# Altium PCB Linear_camera_PCB.PcbDoc
Units mm, origin at the board's own origin, x right, y up, seen from the top; angles counter-clockwise.
Board outline 25 x 25 mm, 4 copper layers (Top Layer, Internal Plane 1, Internal Plane 2, Bottom Layer); 13 components, 9 nets, 43 pads, 26 vias.
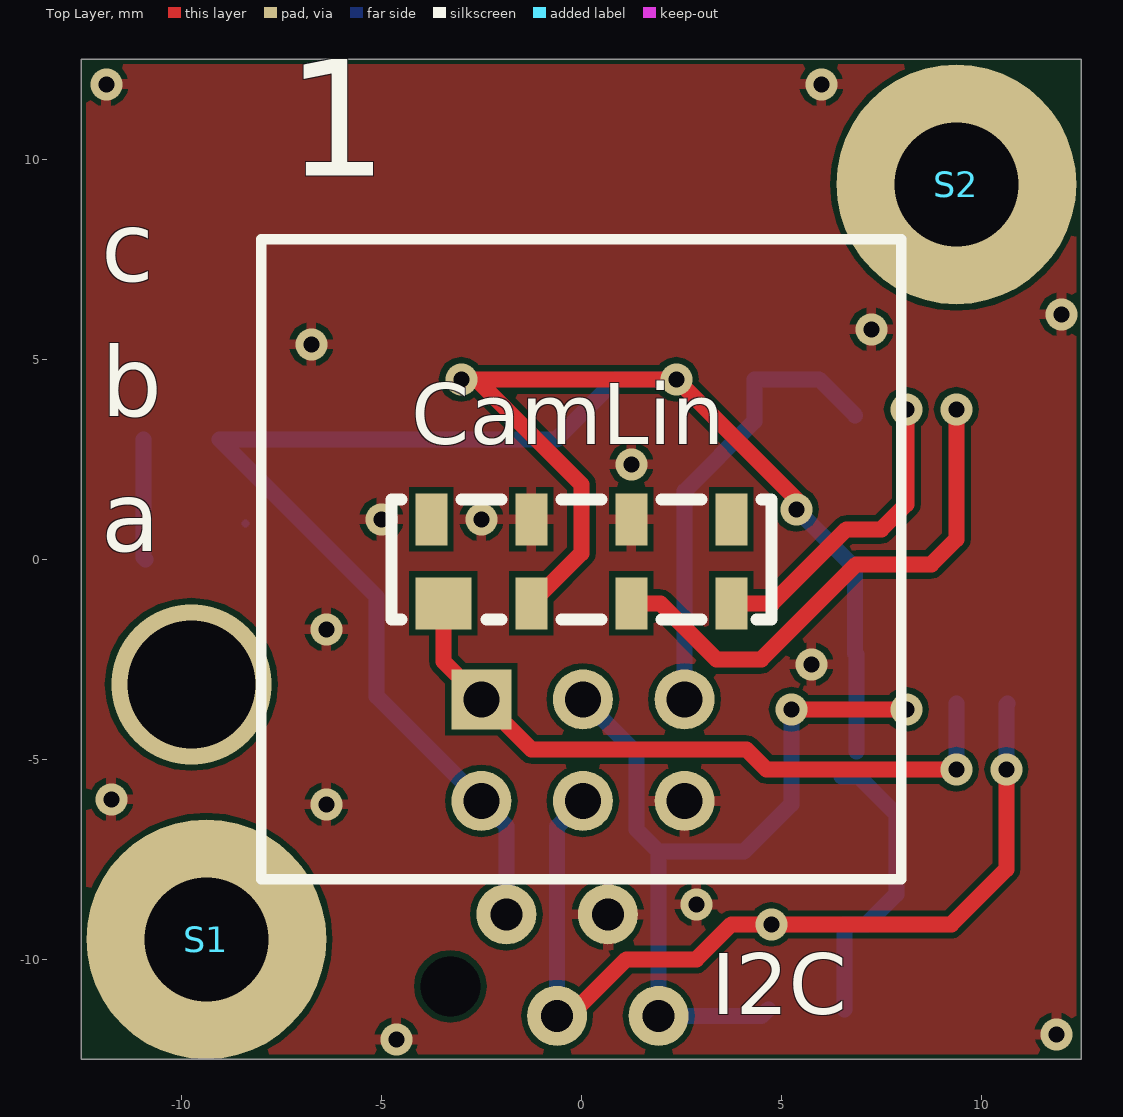
[diagram p0: Top Layer view]
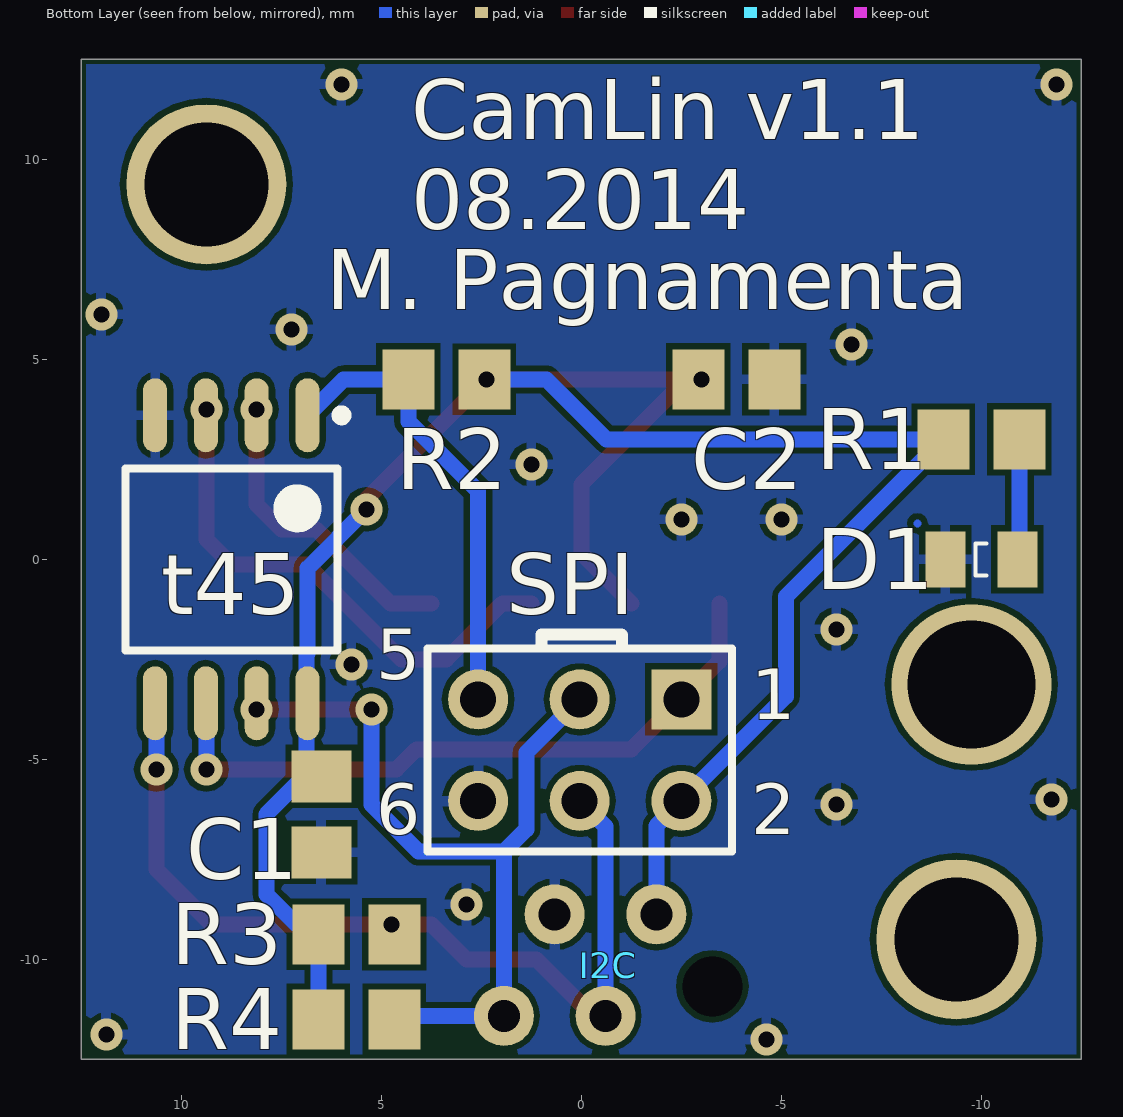
[diagram p1: Bottom Layer view, seen from below]
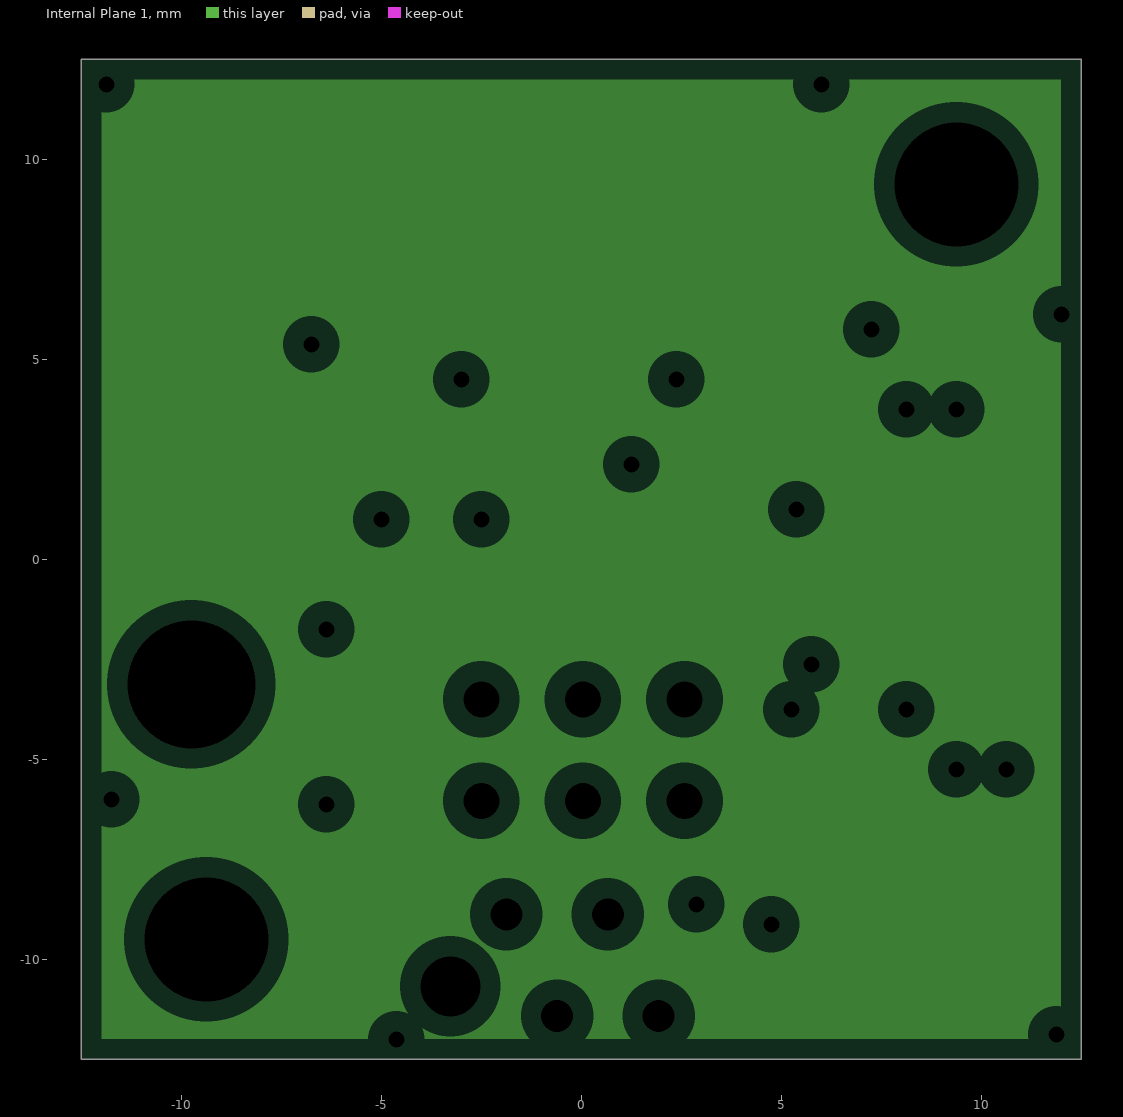
[diagram p2: Internal Plane 1, clearances drawn from the general rule]
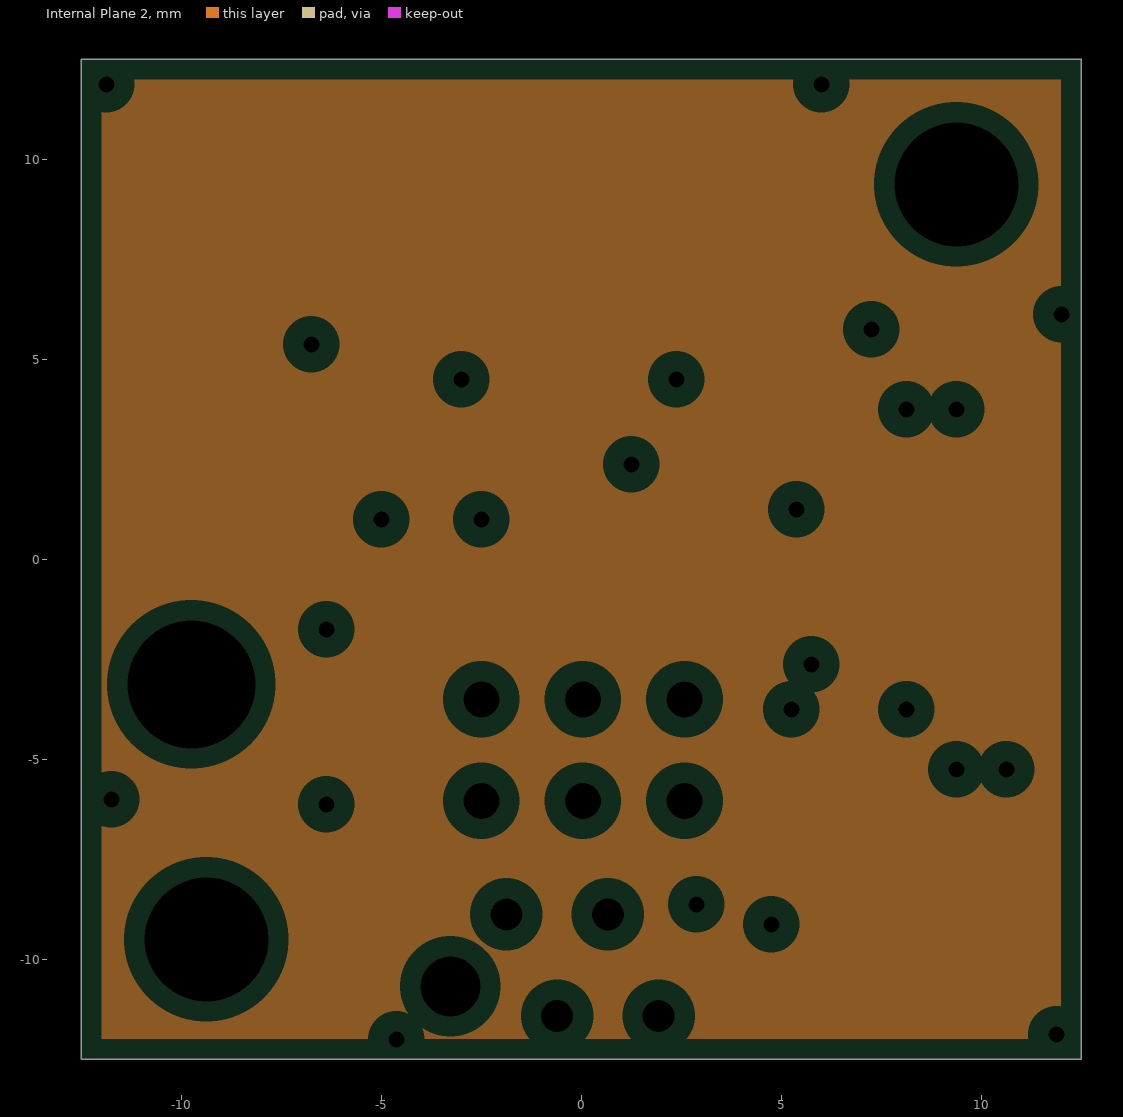
[diagram p3: Internal Plane 2, clearances drawn from the general rule]
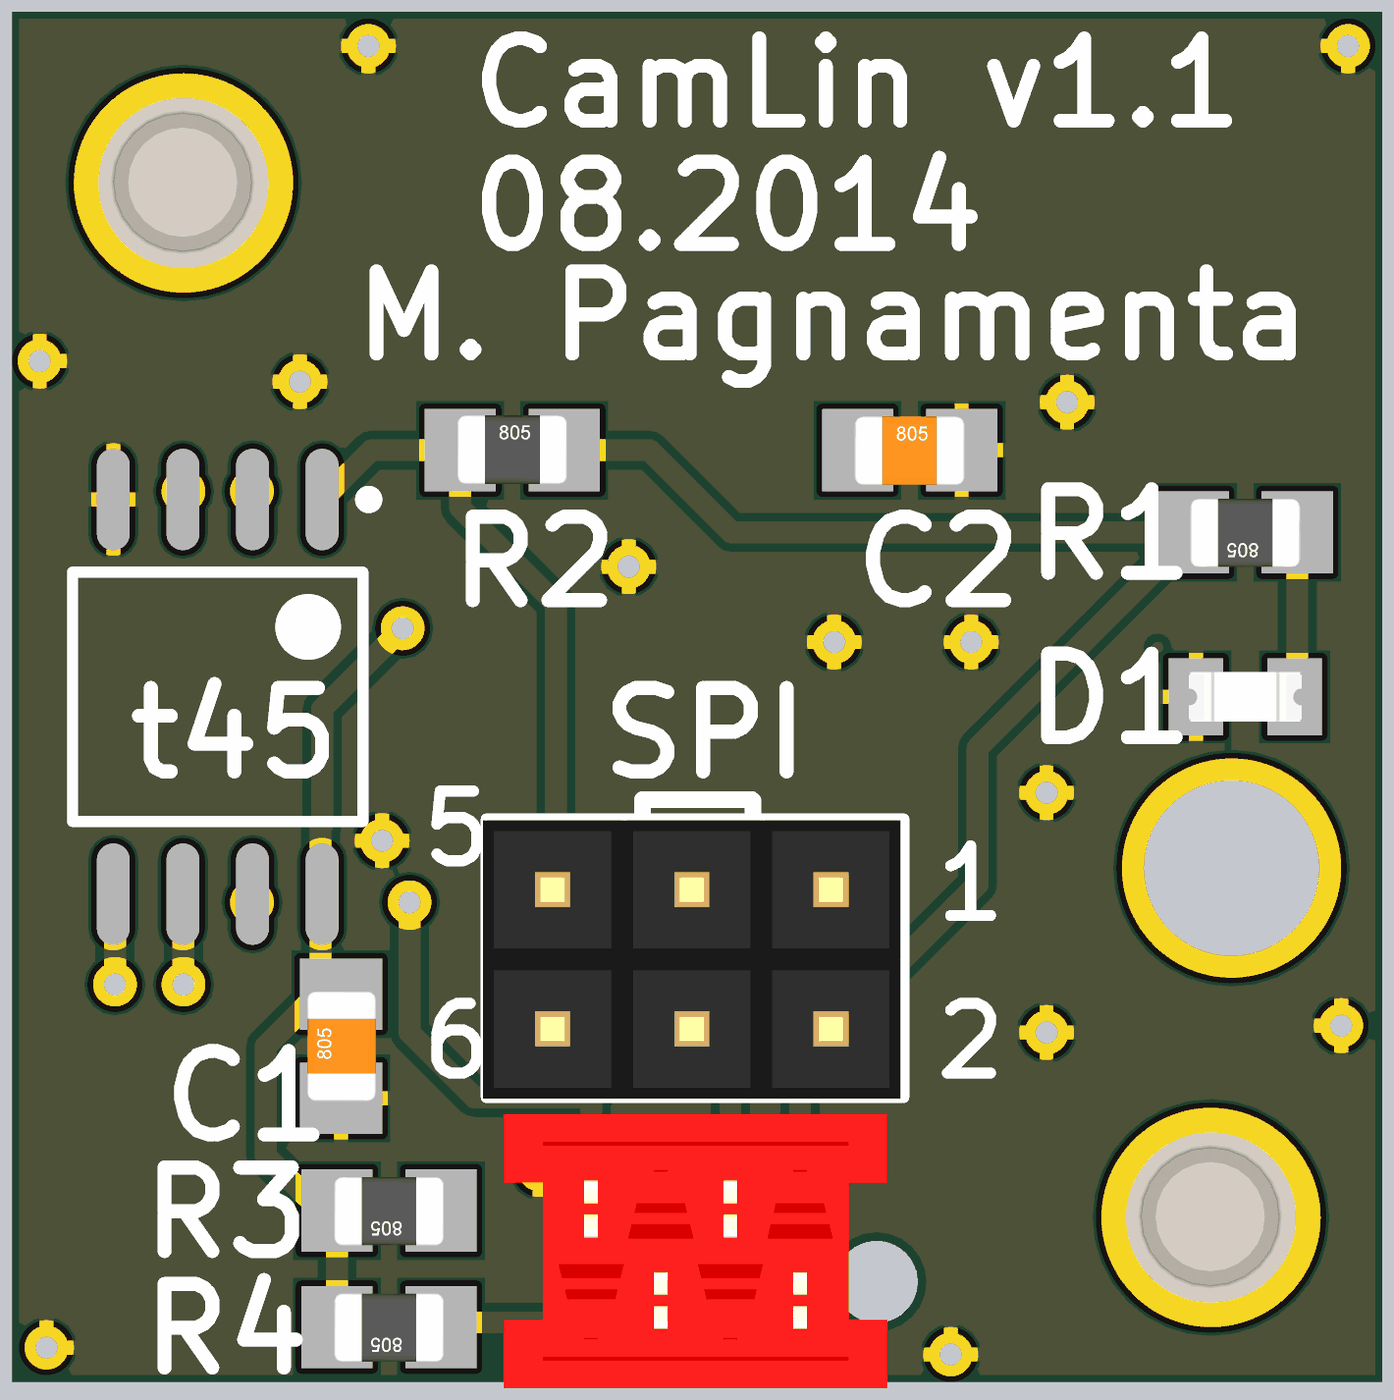
[diagram p4: 3D render of the assembled board from below, using the file's embedded part models]

## Layer stack, top to bottom
Top Layer: signal copper 0.0356
Dielectric: dielectric 0.32, FR-4, Dk 4.8
Internal Plane 1: plane copper 0.0356
Dielectric: dielectric 0.32, FR-4, Dk 4.8
Internal Plane 2: plane copper 0.0356
Dielectric: dielectric 0.32, FR-4, Dk 4.8
Bottom Layer: signal copper 0.0356

## Board outline
-12.5,-12.5 12.5,-12.5 12.5,12.5 -12.5,12.5

## Design rules (kind name [scope] priority, off if disabled: settings)
Clearance [All] p1: gap=0.15
PlaneClearance [All] p1: clearance=0.508
PlaneConnect [All] p1: planeconnectstyle=Direct reliefexpansion=0.508 reliefentries=4 reliefconductorwidth=0.254 reliefairgap=0.254
PolygonConnect PolygonConnect_nettie [InComponent('nt1') vs InNet('GND')] p1: connectstyle=Direct reliefconductorwidth=0.254 reliefentries=4 polygonreliefangle="90 Angle"
PolygonConnect PolygonConnect_pad [InComponent('U3') vs InNet('GND')] p2: connectstyle=Direct reliefconductorwidth=0.254 reliefentries=4 polygonreliefangle="90 Angle"
PolygonConnect [All] p3: connectstyle=Relief reliefconductorwidth=0.254 reliefentries=4 polygonreliefangle="90 Angle"
RoutingVias [All] p1: holewidth=0.35 width=0.6 viastyle="Through Hole" minholewidth=0.2 minwidth=0.4 maxholewidth=1.2 maxwidth=1
SilkscreenOverComponentPads [All] p1: minsilkscreentomaskgap=0.254
SolderMaskExpansion SolderMaskExpansion_via [IsVia] p1: expansion=-0.5
SolderMaskExpansion [All] p2: expansion=0.102
Width [All] p1: maxlimit=1 minlimit=0.203 preferedwidth=0.203
25 further rules are at their usual default settings.

## Components (designator, comment, footprint, x,y, rotation, side; value= is the part's Value field where it differs from the comment)
C1 "C" C/0805 6.5,-6.375 r90 bottom
C2 "C" C/0805 -3.875,4.5 r180 bottom
CamLin "Header 2" TSL3301CL -3.75,1 r90 top (schematic designator P3)
D1 "LED" LED-2012[0805] -10,0 r180 bottom
I2C "I2C" TYCO/215079-4 -1.875,-8.875 r180 bottom (schematic designator P2)
R1 "1kOhm" R/0805 -10,3 r0 bottom
R2 "10kOhm" R/0805 3.375,4.5 r180 bottom
R3 "10kOhm" R/0805 5.625,-9.375 r0 bottom
R4 "10kOhm" R/0805 5.625,-11.5 r0 bottom
S1 "SCREW" HW/SCREW/M3 -9.375,-9.5 r0 top
S2 "SCREW" HW/SCREW/M3 9.375,9.375 r0 top
SPI "ISP" HEADER2X3 -2.5,-3.5 r0 bottom (schematic designator P1)
t45 "ATtiny25" SOP8S2 8.75,0 r270 bottom

## Footprints (in the part's own frame and the unit in brackets; to place one, negate y for a bottom-side part, rotate by r counter-clockwise, add the part's x,y. Pads: shape width x height; smd on the part's side, far side on the other; paste and mask are expansions set on the pad)
C/0805 [mm] "Chip Resistor; Body 2.0 x 1.3 mm (LxW typ)"
  rect 1.3x1.5 smd: 1(-0.95,0) 2(0.95,0)
  body extent -1,-0.64 1,0.62, height 0.78
HEADER2X3 [mm] "Connector; Header; 3x2 Position"
  rect 1.5x1.5 hole 0.9: 1(0,0)
  round 1.5 hole 0.9: 2(0,2.54) 3(2.54,0) 4(2.54,2.54) 5(5.08,0) 6(5.08,2.54)
  silkscreen extent -1.27,-1.27 6.35,3.81, body extent -1.21,-1.25 6.41,3.83, height 8.44
HW/SCREW/M3 [mm]
  round 6 / inner round 4 / far side round 4 hole 3.1: 1(0,0)
  body extent -2.24,-2.24 2.26,2.26, height 2.5
LED-2012[0805] [mm] "SMD LED - 0805 package"
  rect 1x1.4 smd: A(0.9,0) K(-0.9,0)
  Top Layer lines w0.203: -1.6,0.9 -1.6,0.9
  silkscreen extent -0.15,-0.4 0.13,0.4, body extent -1.03,-0.46 1.03,0.45, height 0.84
R/0805 [mm] "Chip Resistor; Body 2.0 x 1.3 mm (LxW typ)"
  rect 1.3x1.5 smd: 1(-0.95,0) 2(0.95,0)
  body extent -1,-0.62 1,0.63, height 0.78
SOP8S2 [mm]
  oval 1.85x0.6 smd: 1(-3.6,1.905) 2(-3.6,0.635) 3(-3.6,-0.635) 4(-3.6,-1.905) 5(3.6,-1.905) 6(3.6,-0.635) 7(3.6,0.635) 8(3.6,1.905)
  silkscreen extent -3.72,-2.65 2.27,2.88, body extent -2.7,-2.68 2.7,2.68, height 1.7
TSL3301CL [mm]
  rect 1.3x1.4 smd: 1(-2.1,-0.3)
  rect 1.3x0.8 smd: 2(-2.1,-2.5) 3(-2.1,-5) 4(-2.1,-7.5) 5(0,-7.5) 6(0,-5) 7(0,-2.5) 8(0,0)
TYCO/215079-4 [mm]
  round 1.5 hole 0.8: 1(0,0) 2(-1.27,-2.54) 3(-2.54,0) 4(-3.81,-2.54)
  round 1.3 hole 1.5 unplated: 5(1.4,-1.8)
  body extent -5.41,-3.74 1.6,1.26, height 4

## Part data
C1 C2: "Capacitor"
CamLin: library part TSL3301CL, "Header, 2-Pin"
I2C: library part Micromatch-I2C, "Micromatch I2C Connector"
R1 R2 R3 R4: library part R, "Resistor"
SPI: library part "AVR ISP 6pin", "AVR ISP 6pin"

## Via types
v1: diameter 0.8, hole 0.4, Top Layer to Bottom Layer, 25 vias
v2: diameter 4, hole 3.2, Top Layer to Bottom Layer, 1 vias

## Nets (pads, with @x,y where several pads share a name; then routed paths per layer and width w, separated by ;. In a path a pad name is that pad's centre, name@x,y a point inside that pad or via, vN(x,y) a via of type N, cw(c..) or ccw(c..) an arc to the next point about the centre after c; other vN are vias at no path point)
GND: C1.1 C2.2 CamLin.6 CamLin.7 D1.K I2C.3 SPI.6 t45.4
  other v1: -4.625,-12 11.875,-11.875 2.875,-8.625 -6.375,-6.125 -11.75,-6 5.75,-2.625 -6.375,-1.75 -5,1 -2.5,1 1.25,2.375 -6.75,5.375 7.25,5.75 12,6.125 -11.875,11.875 6,11.875
MISO: CamLin.1 SPI.1 t45.6 | length 17
  Top Layer w0.4: CamLin.1 -3.45,-2.55 SPI.1 -1.25,-4.75 4.125,-4.75 4.625,-5.25 v1(9.375,-5.25)
  Bottom Layer w0.4: v1(9.375,-5.25) 9.375,-3.61 t45.6
MOSI: I2C.2 R3.1 SPI.4 t45.5 | length 22.6
  Top Layer w0.4: I2C.2 -0.29,-11.415 1.125,-10 2.875,-10 3.75,-9.125 v1(4.75,-9.125) 9.25,-9.125 10.625,-7.75 v1(10.625,-5.25)
  Bottom Layer w0.4: I2C.2 -0.605,-6.685 SPI.4 ; v1@10.655,-5.22 v1(10.625,-5.25) 10.625,-3.63 t45.5
NetD1_A: D1.A R1.1 | length 3
  Bottom Layer w0.4: R1.1 -10.95,0.05 D1.A
RESET: R2.1 SPI.5 t45.1 | length 11.6
  Bottom Layer w0.4: SPI.5 2.58,1.705 4.325,3.45 R2.1 5.945,4.5 t45.1
SCK: I2C.4 R4.1 SPI.3 t45.7 | length 20.6
  Top Layer w0.4: v1(5.25,-3.75) v1(8.125,-3.75)
  Bottom Layer w0.4: SPI.3 1.375,-4.835 1.375,-6.75 1.935,-7.31 ; R4.1@4.675,-11.25 4.51,-11.415 I2C.4 1.935,-7.31 ; v1(5.25,-3.75) 5.25,-6.125 4.065,-7.31 1.935,-7.31
SDIN: CamLin.3 t45.3 | length 13.2
  Top Layer w0.4: CamLin.3 1.975,-1.1 3.375,-2.5 4.5,-2.5 6.875,-0.125 8.75,-0.125 9.375,0.5 v1(9.375,3.75)
SDOUT: CamLin.4 t45.2 | length 7.8
  Top Layer w0.4: CamLin.4 4.775,-1.1 6.625,0.75 7.5,0.75 8.125,1.375 v1(8.125,3.75)
VCC: C1.2 C2.1 CamLin.2 I2C.1 R1.2 R2.2 R3.2 R4.2 SPI.2 t45.8 | length 58.2
  Top Layer w0.4: v1(-3,4.5) v1@-2.625,4.5 ; CamLin.2 0,0.15 0,1.875 v1@-2.625,4.5 ; v1(5.375,1.25) 5.375,1.5 v1(2.375,4.5) v1@-2.625,4.5
  Bottom Layer w0.4: I2C.1 -1.875,-6.665 SPI.2 -5.115,-3.425 -5.115,-0.935 R1.2 -0.625,3 0.875,4.5 v1(2.375,4.5) R2.2 ; v1(5.375,1.25) 6.845,-0.22 6.845,-2.35 6.875,-2.38 C1.2@6.875,-4.8 ; C1.2 6.925,-5.425 7.875,-6.375 7.875,-8.375 7.125,-9.125 6.575,-9.125 R3.2 R4.2@6.575,-11.25
pads on no net: CamLin.5 CamLin.8 I2C.5 S1.1 S2.1
copper on no net:
  other v2: -9.75,-3.125

## Polygon pours and split planes (outlines as drawn)
GND on Bottom Layer "Top Layer-No Net" (solid, remove dead copper, pour order 9): 12.375,12.375 12.375,-12.375 -12.375,-12.375 -12.375,12.375
GND on Top Layer "Top Layer-No Net" (solid, remove dead copper, pour order 14): 12.375,12.375 12.375,-12.375 -12.375,-12.375 -12.375,12.375
no net on Internal Plane 1 (split plane): 11.99,-11.99 -11.99,-11.99 -11.99,11.99 11.99,11.99
no net on Internal Plane 2 (split plane): 11.99,-11.99 -11.99,-11.99 -11.99,11.99 11.99,11.99

## Silkscreen, mask and mechanical layers (free items; w line width, h text height)
Top Overlay:
  lines w0.254: -8,-8 8,-8 8,8 -8,8 -8,-8
  lines w0.3: -4.5,-1.5 -4.75,-1.5 -4.75,1.5 -4.5,1.5 ; -3,1.5 -2,1.5 ; -2.375,-1.5 -2,-1.5 ; -0.5,-1.5 0.5,-1.5 ; -0.5,1.5 0.5,1.5 ; 2,-1.5 3,-1.5 ; 2,1.5 3,1.5 ; 4.375,-1.5 4.75,-1.5 4.75,1.5 4.5,1.5
  text "1" at -7.375,8.625 h5
  text "c" at -12,6.375 h3
  text "b" at -12,3 h3
  text "a" at -12,-0.375 h3
Bottom Overlay:
  lines w0.3: -1.018,-2.125 -1.018,-1.893 -1,-1.875 1,-1.875 1,-2.125
  text "CamLin v1.1" at 4.25,10.5 h1.5
  text "08.2014" at 4.25,8.25 h1.5
  text "M. Pagnamenta" at 6.375,6.25 h1.5
Mechanical 1:
  the board outline again, w0.254

## Text inside footprints (layer, text, board x,y; h text height)
SPI: Bottom Overlay "6" at 5.125,-6.875 h1.27; Bottom Overlay "5" at 5.125,-3 h1.27; Bottom Overlay "2" at -4.25,-6.875 h1.27; Bottom Overlay "1" at -4.25,-4 h1.27